# Altium PCB lm75 eeprom.PcbDoc
Units mil, origin at the board's own origin, x right, y up, seen from the top; angles counter-clockwise.
Board outline 800.03 x 1230.03 mil, 2 copper layers (Top Layer, Bottom Layer); 9 components, 6 nets, 52 pads, 6 vias.
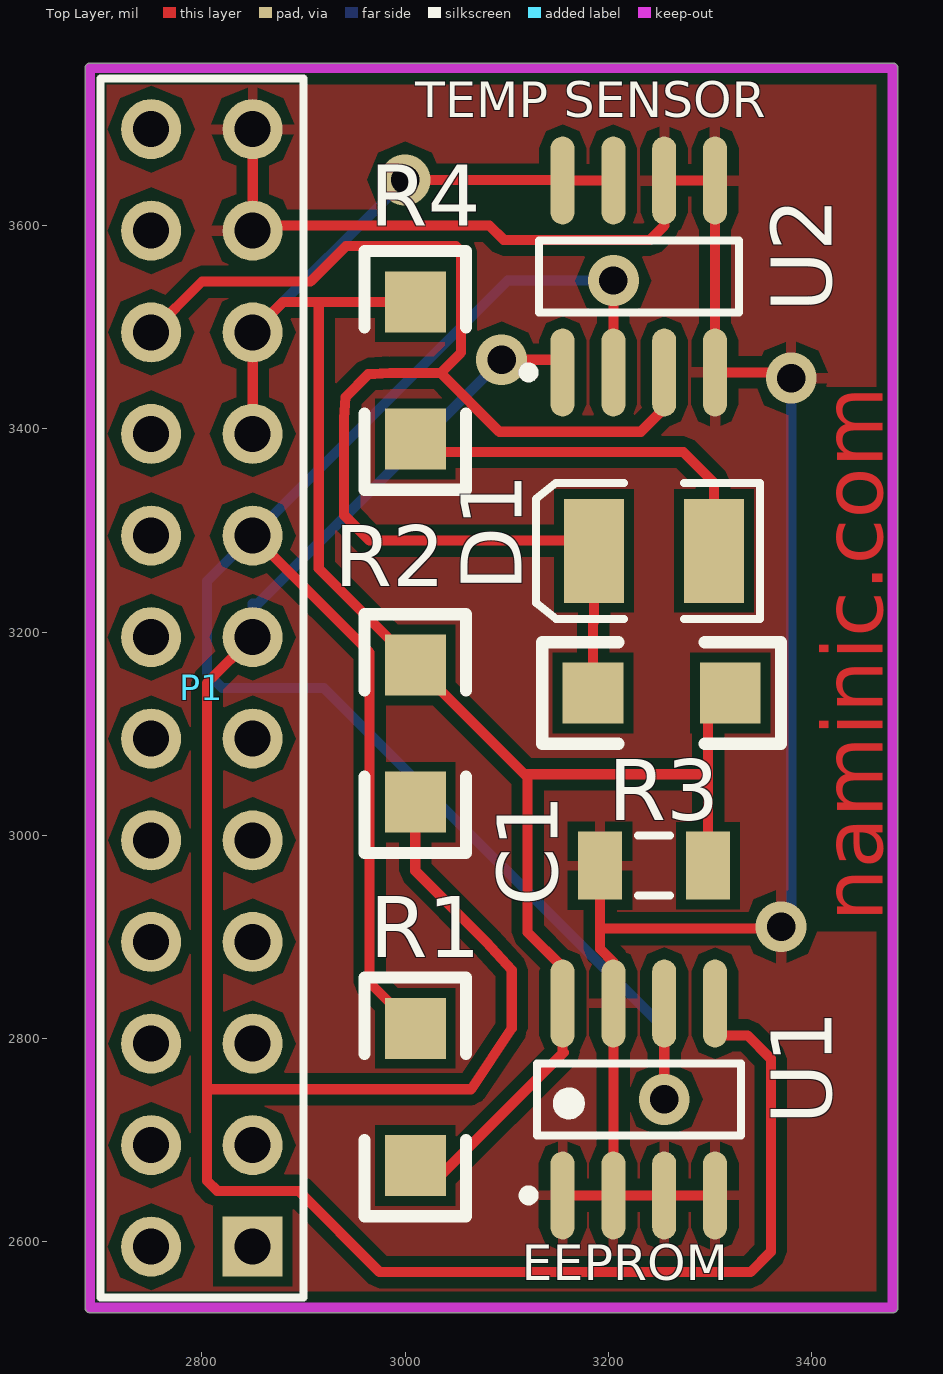
[diagram p0: Top Layer view]
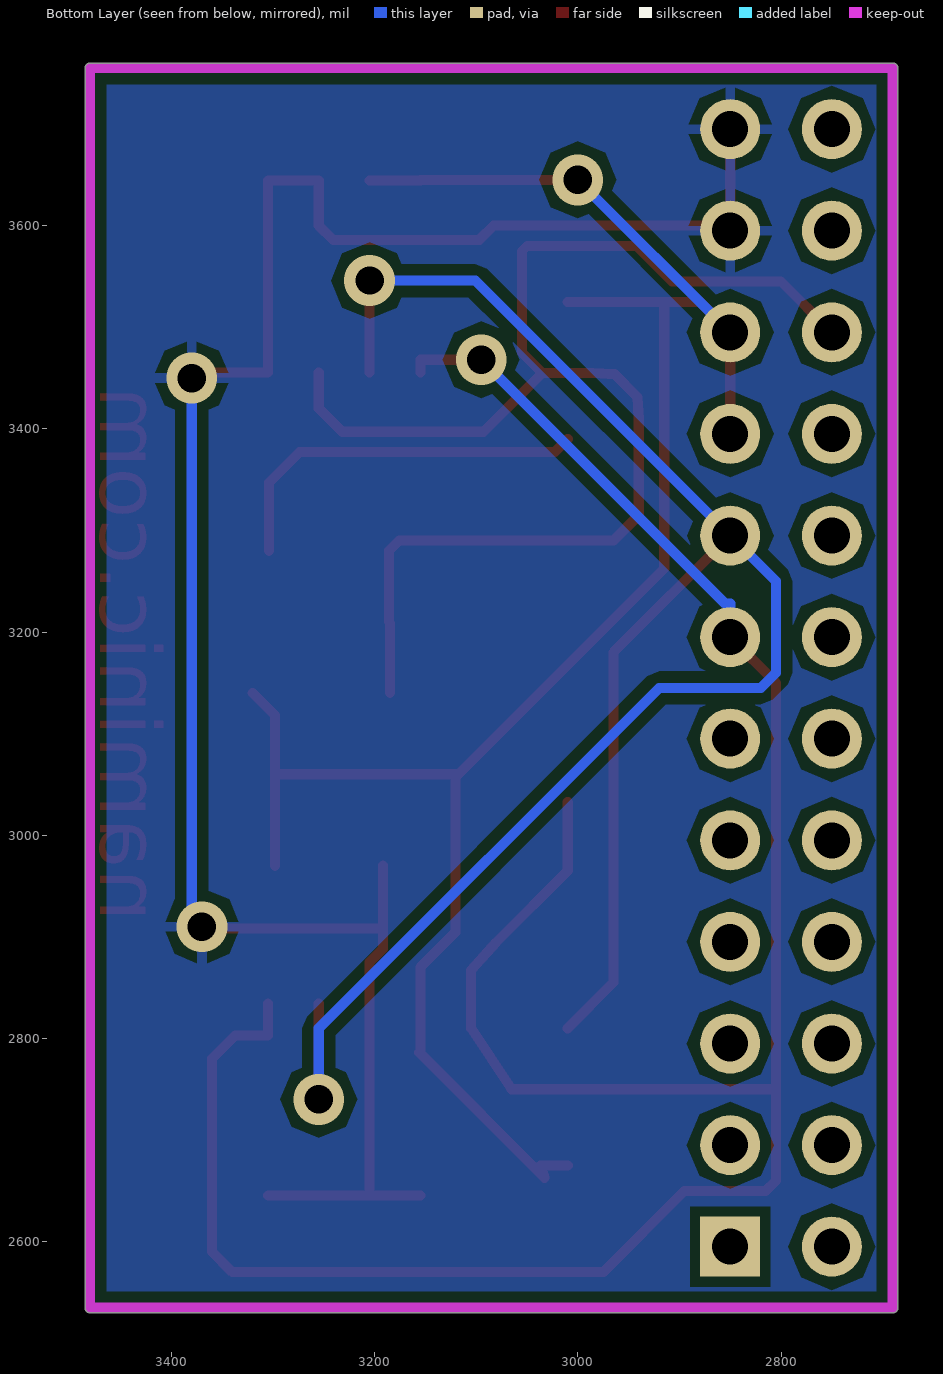
[diagram p1: Bottom Layer view, seen from below]

## Layer stack, top to bottom
Top Layer: signal copper 1.4
Dielectric: dielectric 12.6, FR-4, Dk 4.8
Bottom Layer: signal copper 1.4

## Board outline
2684.99,2535 ccw(c2690,2535) 2690,2529.99 3480,2529.99 ccw(c3480,2535) 3485.01,2535 3485.01,3755 ccw(c3480,3755) 3480,3760.01 2690,3760.01 ccw(c2690,3755) 2684.99,3755

## Design rules (kind name [scope] priority, off if disabled: settings)
Clearance [All] p1: gap=10
PolygonConnect [All] p1: connectstyle=Relief reliefconductorwidth=10 reliefentries=4 polygonreliefangle="90 Angle"
RoutingVias [All] p1: holewidth=28 width=50 viastyle="Through Hole" minholewidth=28 minwidth=50 maxholewidth=28 maxwidth=50
SilkscreenOverComponentPads SilkToSolderMaskClearance [IsPad] p1: minsilkscreentomaskgap=10
SolderMaskExpansion [All] p1: expansion=4
Width [All] p1: maxlimit=10 minlimit=10 preferedwidth=10
27 further rules are at their usual default settings.

## Components (designator, comment, footprint, x,y, rotation, side; value= is the part's Value field where it differs from the comment)
C1 "100nf" C1206 3245,2970 r180 top
D1 "LED1" 3.5X2.8X1.9 3245,3280 r180 top
P1 "Header 12X2" HDR2X12 2850,2595 r90 top
R1 "10K" 1206 3010,2810 r270 top
R2 "10K" 1206 3010,3032.5 r90 top
R3 "10K" 1206 3185,3140 r0 top
R4 "180" 1206 3010,3525 r270 top
U1 "AT24C02BN-SP25-T" 8S1_N 3230,2740 r90 top
U2 "DS75S" MAXM-S8-2_N 3230,3550 r90 top

## Footprints (in the part's own frame and the unit in brackets; to place one, negate y for a bottom-side part, rotate by r counter-clockwise, add the part's x,y. Pads: shape width x height; smd on the part's side, far side on the other; paste and mask are expansions set on the pad)
3.5X2.8X1.9 [mm] "SM LED; 2 C-Bend Leads; Body 3.5 x 2.8 x 1.9 mm, inc leads (LxWxH typ)"
  rect 1.5x2.6 smd: 1(-1.5,0) 2(1.5,0)
  silkscreen extent -2.65,-1.7 2.95,1.7
8S1_N [mm] "SOIC, 8-Leads, Body 4.9x3.9mm, Pitch 1.27mm, IPC Medium Density"
  oval 2.2x0.6 smd: 1(-2.4,1.905) 2(-2.4,0.635) 3(-2.4,-0.635) 4(-2.4,-1.905) 5(2.4,-1.905) 6(2.4,-0.635) 7(2.4,0.635) 8(2.4,1.905)
  silkscreen extent -2.52,-2.55 0.9,2.88, body extent -1.99,-2.52 1.99,2.52, height 1.75
1206 [mil]
  rect 60x60 smd: 1(0,0) 2(135,0)
  silkscreen extent -50,-50 185,50, body extent -14,-35 151,36, height 25
C1206 [mm] "Chip Capacitor, Body 3.2x1.6mm, IPC High Density"
  rect 1.1x1.7 smd: 1(-1.35,0) 2(1.35,0)
  silkscreen extent -0.4,-0.75 0.4,0.75, body extent -1.7,-0.9 1.7,0.9, height 1.3
HDR2X12 [mm] "Connector; Header; 12x2 Position"
  rect 1.5x1.5 hole 0.9: 1(0,0)
  round 1.5 hole 0.9: 2(0,2.54) 3(2.54,0) 4(2.54,2.54) 5(5.08,0) 6(5.08,2.54) 7(7.62,0) 8(7.62,2.54) 9(10.16,0) 10(10.16,2.54) 11(12.7,0) 12(12.7,2.54) 13(15.24,0) 14(15.24,2.54) 15(17.78,0) 16(17.78,2.54) 17(20.32,0) 18(20.32,2.54) 19(22.86,0) 20(22.86,2.54) 21(25.4,0) 22(25.4,2.54) 23(27.94,0) 24(27.94,2.54)
  silkscreen extent -1.27,-1.27 29.21,3.81
MAXM-S8-2_N [mm] "SOIC, 8-Leads, Body 4.90x3.90mm, Pitch 1.27mm, IPC Medium Density"
  oval 2.2x0.6 smd: 1(-2.4,1.905) 2(-2.4,0.635) 3(-2.4,-0.635) 4(-2.4,-1.905) 5(2.4,-1.905) 6(2.4,-0.635) 7(2.4,0.635) 8(2.4,1.905)
  silkscreen extent -2.52,-2.5 0.9,2.88, body extent -2,-2.5 2,2.5, height 1.75

## Part data
C1: library part "Cap Semi", "Capacitor (Semiconductor SIM Model)"
D1: library part LED3, "Typical BLUE SiC LED"
P1: "Header, 12-Pin, Dual row"
R1 R2 R3 R4: library part Res3, "Resistor"
U1: "2Kbit (256 x 8), 2-wire Bus Automotive Serial EEPROM with full memory Write Protect, 2.5V, 8-Pin SOIC, Tape & Reel"
U2: "Digital Thermometer and Thermostat, 9 to 12 Bits Temperature Resolution, -55 to 125 degC, 8-Pin SOIC (S8-2)"

## Via types
v1: diameter 50, hole 28, Top Layer to Bottom Layer, 6 vias

## Nets (pads, with @x,y where several pads share a name; then routed paths per layer and width w, separated by ;. In a path a pad name is that pad's centre, name@x,y a point inside that pad or via, vN(x,y) a via of type N, cw(c..) or ccw(c..) an arc to the next point about the centre after c; other vN are vias at no path point)
3.3V: C1.1 P1.17 P1.19 R1.2 R2.2 R3.2 R4.1 U1.8 U2.7 U2.8 | length 2196.4
  Top Layer w10: P1.17 P1.19 2880,3525 R4.1 2915,3525 2915,3262.5 R2.2 3119.01,3058.49 ; v1(3000,3645) 3155,3645 U2.8 U2.7 ; R1.2 3036.55,2675 3032.75,2662.75 3156.25,2786.25 3155,2786 U1.8 3155,2870 3120.51,2904.49 3120.51,3060 3298.15,3060 ; C1.1 3298.15,3118.15 R3.2
  Bottom Layer w10: P1.19 v1(3000,3645)
GND: C1.2 P1.21 P1.23 U1.1 U1.2 U1.3 U1.4 U1.7 U2.4 U2.5 U2.6 | length 2078.8
  Top Layer w10: P1.23 P1.21 2855,3600 3083,3600 3097,3586 3241,3586 3255,3600 U2.6 U2.5 U2.4 v1@3379.49,3455.51 ; U1.1 U1.2 ; 3191.85,2908.15 v1@3370,2908.15 ; C1.2 3191.85,2888.15 3205,2875 U1.7 U1.2 ; U1.4 U1.3 U1.2
  Bottom Layer w10: v1(3370,2910) 3380,2920 v1(3380,3450)
INT: D1.2 P1.20 R3.1 U2.3 | length 1379.6
  Top Layer w10: P1.20 2800,3545 2907,3545 2942,3580 3050,3580 3055,3575 3055,3475 3035,3455 ; R3.1 3185,3209 3185.94,3209.94 D1.2 3175.94,3290 2965,3290 2940,3315 2940,3410 2941.25,3431.25 2963.75,3453.75 2985,3455 3035,3455 ; U2.3 3255,3420.2 3232,3397.2 3092.8,3397.2 3035,3455
NetD1_1: D1.1 R4.2 | length 378.8
  Top Layer w10: R4.2 3022.8,3377.2 3273.8,3377.2 3304.06,3346.94 D1.1
SCL: P1.15 R1.1 U1.6 U2.2 | length 2013.8
  Top Layer w10: P1.15 2965,3180 2965,2855 R1.1 ; U2.2 v1(3205,3546) ; v1(3255,2740) U1.6
  Bottom Layer w10: v1(3205,3546) 3101,3546 P1.15 2805,3250 2805,3160 2820,3145 2920,3145 3255,2810 v1(3255,2740)
SDA: P1.13 R2.1 U1.5 U2.1 | length 2483.4
  Top Layer w10: P1.13 2805,3150 2805,2750 ; R2.1 3010,2965 3080,2895 3105,2867.5 3105,2810 3065,2750 2805,2750 ; v1(3095,3468) 3155,3468 U2.1 ; U1.5 3305,2803 3337,2803 3360,2780 3360,2590 3340,2570 2975,2570 2895,2650 2815,2650 2805,2660 2805,2750
  Bottom Layer w10: P1.13 2850,3228 2855,3228 v1(3095,3468)
pads on no net: P1.1 P1.2 P1.3 P1.4 P1.5 P1.6 P1.7 P1.8 P1.9 P1.10 P1.11 P1.12 P1.14 P1.16 P1.18 P1.22 P1.24

## Polygon pours and split planes (outlines as drawn)
GND on Bottom Layer "Top Layer-No Net" (solid, pour order 1000): 2690,3755 3480,3755 3480,2535 2690,2535 2690,3755
GND on Top Layer "Top Layer-No Net" (solid, pour order 1): 2690,3755 3480,3755 3480,2540 3480,2535 2690,2535 2690,3755

## Keep-outs
Keep-Out Layer:
  lines w10: 2690,2535 3480,2535 3480,3755 2690,3755 2690,2535

## Other copper
Top Layer:
  text "naminic.com" at 3470,2915 h60 r90

## Silkscreen, mask and mechanical layers (free items; w line width, h text height)
Top Overlay:
  text "TEMP SENSOR" at 3010,3695 h60
  text "EEPROM" at 3115,2550 h60